# Altium PCB 敏儿好学.PcbDoc (part 2 of 6)
Units mm, origin at the board's own origin, x right, y up, seen from the top; angles counter-clockwise.
Board outline 169.8 x 134.24 mm, 2 copper layers (Top Layer, Bottom Layer); 131 components, 191 nets, 797 pads, 168 vias.
Unrouted connection lines stored in the file: 2.
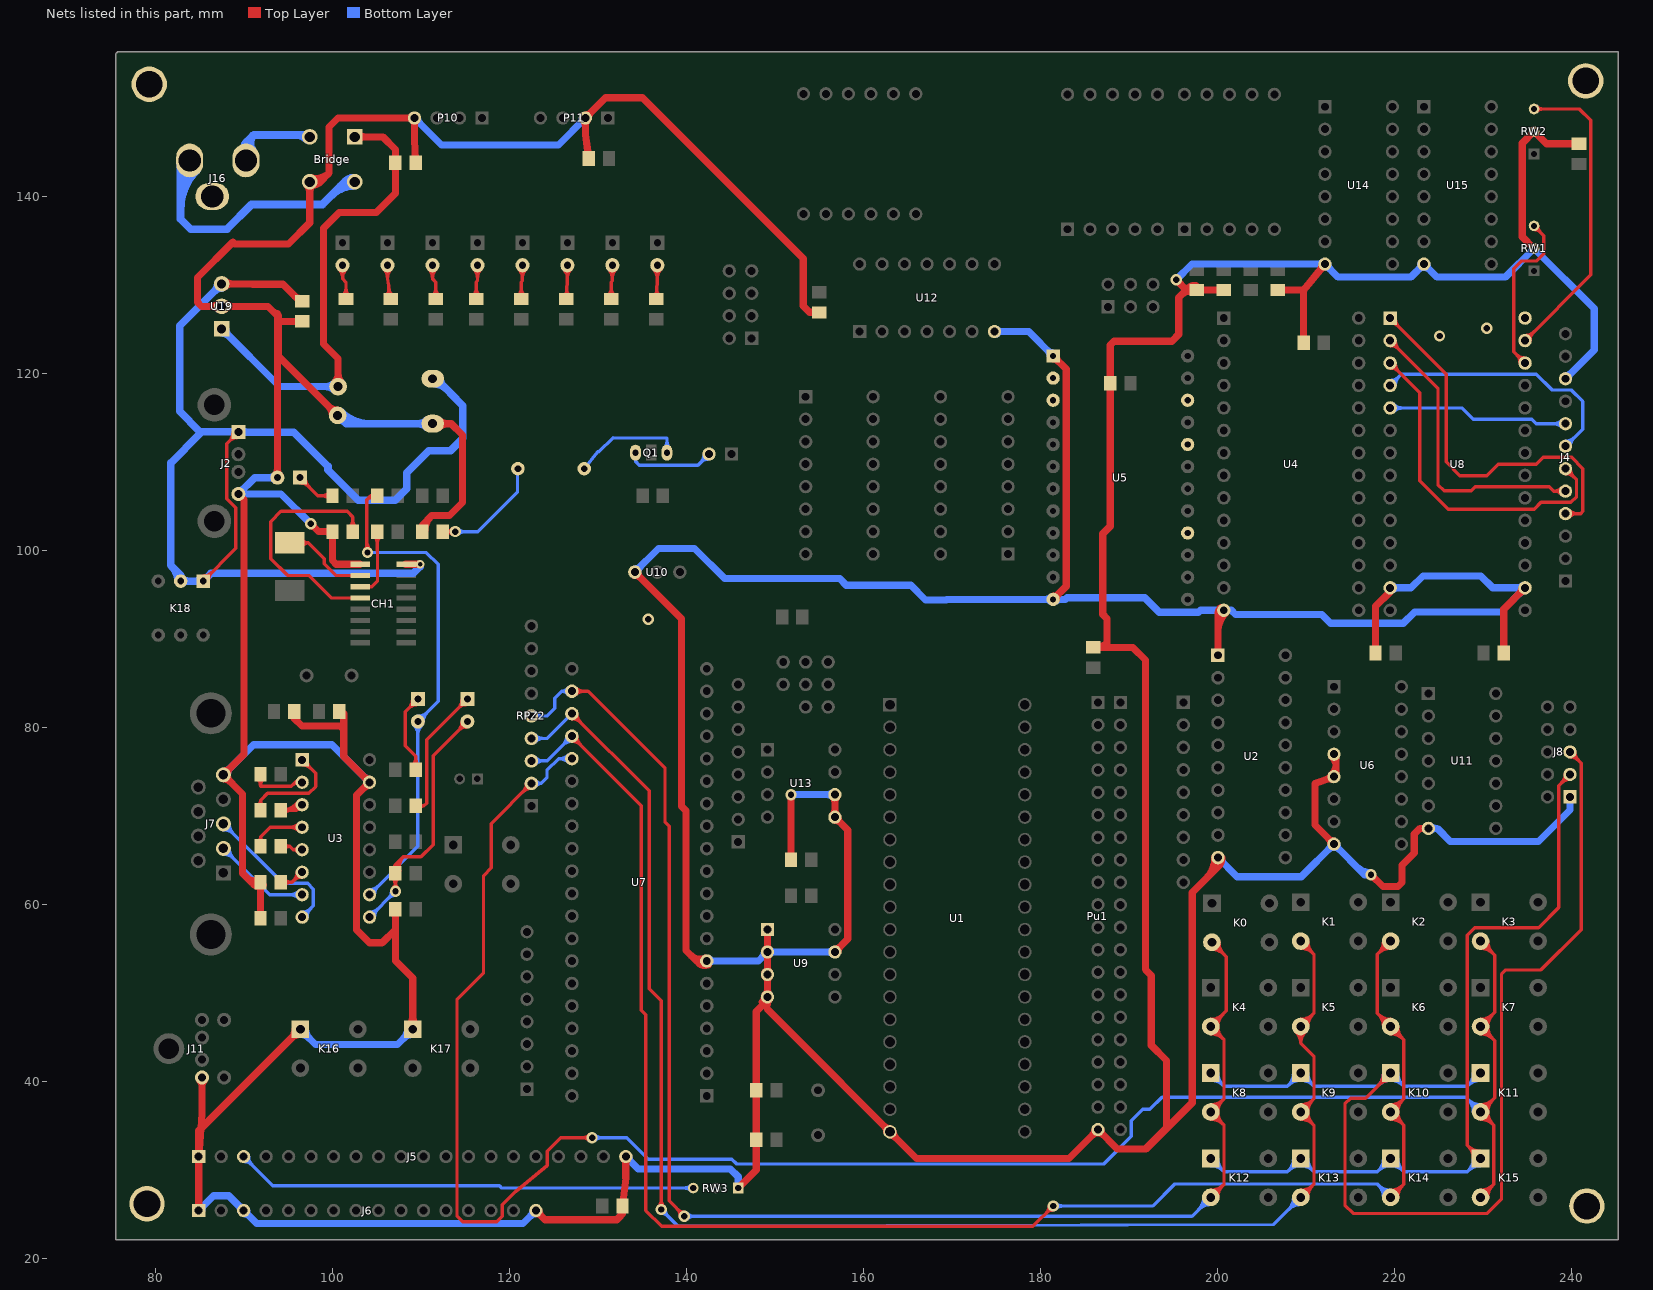
[diagram p2: the nets of this part, all layers, seen from the top]

## Via types
v1: diameter 1.27, hole 0.711, Top Layer to Bottom Layer, 165 vias
v2: diameter 1, hole 0.5, Top Layer to Bottom Layer, 3 vias

## Nets (pads, with @x,y where several pads share a name; then routed paths per layer and width w, separated by ;. In a path a pad name is that pad's centre, name@x,y a point inside that pad or via, vN(x,y) a via of type N, cw(c..) or ccw(c..) an arc to the next point about the centre after c; other vN are vias at no path point) (continued)
GND: Bridge.4 C1.2 C2.2 C3.2 C7.1 C8.1 C9.2 C10.2 C11.2 C12.2 C13.2 C14.2 C15.2 C16.2 C17.2 C18.2 C19.2 C20.2 C21.2 C22.2 C24.1 C42.1 CH1.1 D9.2 J2.4 J4.10 J5.1 J5.20 J6.1 J6.3 J6.16 J7.5 J8.1 J11.3 K16.1 K17.1 P10.4 P11.2 pad.0@78.994,26.162 pad.1@79.248,152.654 pad.2 pad.3 Pu1.20 R12.1 R16.1 R17.2 R22.1 R23.2 RW1.2 RW2.2 RW3.1 U1.20 U2.1 U2.10 U3.15 U4.14 U5.1 U5.12 U6.4 U6.5 U6.8 U7.7 U8.13 U8.16 U9.1 U9.2 U9.3 U9.4 U9.7 U10.1 U11.7 U12.7 U13.5 U13.6 U14.8 U15.8 U19.2 | length 1321.9
  Top Layer w0.813: J6.1@84.593,25.643 ccw(c84.006,26.23) 84.836,26.23 ccw(c85.666,26.23) J6.1@85.079,25.643 ; J5.1@84.593,31.253 cw(c84.006,30.666) 84.836,30.666 cw(c85.666,30.666) J5.1@85.079,31.253 ; J5.1@84.593,31.739 ccw(c84.006,32.326) 84.836,32.326 ccw(c85.666,32.326) J5.1@85.079,31.739 ; J5.1@84.612,31.757 ccw(c84.072,32.387) 84.9,32.323 ccw(c85.727,32.26) J5.1@85.097,31.72 ; J6.1@84.836,25.4 84.836,34.406 K16.1@96.318,45.888 ; J5.1@84.836,31.496 85.078,34.648 85.208,36.338 J11.3@85.208,40.438 ; J11.3@84.93,40.16 cw(c84.258,39.488) 85.208,39.488 cw(c86.158,39.488) J11.3@85.486,40.16 ; U19.2@87.086,127.218 ccw(c86.262,126.394) 86.262,127.559 ccw(c86.262,128.724) U19.2@87.086,127.9 ; J7.5@87.628,74.189 cw(c87.628,73.131) 88.377,73.879 cw(c89.125,74.628) 88.067,74.628 cw(c89.125,74.628) 88.377,75.377 cw(c87.628,76.125) J7.5@87.628,75.067 ; U19.2@87.768,127.218 cw(c88.592,126.394) 88.592,127.559 cw(c88.592,128.724) U19.2@87.768,127.9 ; J2.4@89.317,106.355 89.941,105.731 89.941,76.941 J7.5@87.628,74.628 89.789,72.467 89.789,63.5 90.805,62.484 C8.1@91.821,62.484 C7.1@91.821,58.42 ; 90.361,62.928 ccw(c91.051,63.619) C8.1@91.644,62.843 ; 91.017,62.272 ccw(c91.62,62.874) C8.1@92.137,62.197 ; C7.1@91.614,58.754 ccw(c91.116,59.252) 91.821,59.252 ccw(c92.526,59.252) C7.1@92.028,58.754 ; C8.1@91.614,62.15 cw(c91.116,61.652) 91.821,61.652 cw(c92.526,61.652) C8.1@92.028,62.15 ; C8.1@91.614,62.277 ccw(c91.116,61.779) 91.116,62.484 ccw(c91.116,63.189) C8.1@91.614,62.691 ; D9.2@93.448,108.482 ccw(c92.776,109.154) 93.726,109.154 ccw(c94.676,109.154) D9.2@94.004,108.482 ; D9.2@93.726,108.204 93.726,126.746 ; 93.726,126.492 92.659,127.559 85.166,127.559 84.709,128.016 84.709,130.81 88.695,134.796 88.872,134.62 94.996,134.62 97.384,137.008 Bridge.4@97.384,141.63 98.577,141.63 99.568,142.621 ; 93.853,125.603 94.107,125.857 C12.2@96.52,125.857 ; 93.853,126.492 93.853,121.92 C21.2@100.533,115.24 ; C19.2@95.631,81.788 95.631,81.026 96.52,80.137 100.838,80.137 101.219,79.756 ; K16.1@95.724,45.888 cw(c94.291,45.888) 95.305,44.875 cw(c96.318,43.861) K16.1@96.318,45.294 ; C12.2@96.186,125.65 ccw(c95.688,125.152) 95.688,125.857 ccw(c95.688,126.562) C12.2@96.186,126.064 ; Bridge.4@97.042,141.289 cw(c96.218,140.465) 97.384,140.465 cw(c98.549,140.465) 97.725,141.289 cw(c98.549,140.465) 98.549,141.63 cw(c98.549,142.796) Bridge.4@97.725,141.972 ; Bridge.4@97.292,141.313 ccw(c97.66,142.584) 98.595,141.648 ; v1(97.485,102.997) 98.374,102.108 C42.1@99.949,102.108 99.949,98.831 100.355,98.425 CH1.1@103.064,98.425 ; Bridge.4@97.518,142.094 ccw(c98.097,144.092) 99.568,142.621 ; C42.1@99.742,101.774 cw(c99.244,101.276) 99.949,101.276 cw(c100.654,101.276) C42.1@100.156,101.774 ; C42.1@99.742,101.901 ccw(c99.244,101.403) 99.244,102.108 ccw(c99.244,102.813) C42.1@99.742,102.315 ; C21.2@99.94,115.24 ccw(c98.507,115.24) 99.52,116.253 ccw(c100.533,117.266) C21.2@100.533,115.833 ; C20.2@101.219,81.534 101.219,76.708 U3.15@104.14,73.787 102.667,72.314 102.667,57.125 104.14,55.651 105.562,55.651 107.061,57.15 ; U3.15@104.14,73.443 ccw(c104.14,72.614) 103.553,73.2 ccw(c102.967,73.787) 103.796,73.787 ccw(c102.967,73.787) 103.553,74.374 ccw(c104.14,74.96) U3.15@104.14,74.131 ; R12.1@106.854,59.102 cw(c106.356,58.604) 107.061,58.604 cw(c107.766,58.604) R12.1@107.268,59.102 ; R12.1@107.061,59.436 107.061,53.621 109.018,51.664 K17.1@109.018,45.888 ; K17.1@108.598,46.308 ccw(c107.585,47.321) 109.018,47.321 ccw(c110.451,47.321) K17.1@109.438,46.308 ; P10.4@108.977,149.087 cw(c108.39,149.674) 108.39,148.844 cw(c108.39,148.014) 108.977,148.601 cw(c108.39,148.014) 109.22,148.014 cw(c110.05,148.014) P10.4@109.463,148.601 ; 109.307,144.61 ccw(c110.032,144.644) C11.2@109.543,144.107 ; C11.2@109.347,143.764 109.22,146.431 P10.4@109.22,148.844 100.584,148.844 99.568,147.828 99.568,142.621 ; R23.2@110.109,102.108 110.109,102.87 111.172,103.933 113.162,103.933 114.639,105.41 114.639,113.03 113.369,114.3 C22.2@111.277,114.3 ; R23.2@110.401,102.235 cw(c112.639,102.235) 111.057,103.818 ; C22.2@111.962,113.869 cw(c113.003,112.828) 113.003,114.3 cw(c113.003,115.772) C22.2@111.962,114.731 ; J6.16@122.936,25.056 cw(c122.936,24.227) 123.523,24.813 cw(c124.109,25.4) J6.16@123.28,25.4 ; J6.16@122.936,25.4 123.977,24.359 132.08,24.359 132.715,24.994 C24.1@132.715,25.908 133.096,29.083 J5.20@133.096,31.496 ; P11.2@128.281,148.601 cw(c127.694,148.014) 128.524,148.014 cw(c129.354,148.014) P11.2@128.767,148.601 ; P11.2@128.524,149.188 ccw(c128.524,150.017) 129.111,149.431 ccw(c129.697,148.844) P11.2@128.868,148.844 ; 128.781,145.137 ccw(c129.54,145.246) C9.2@129.08,144.633 ; C9.2@128.905,144.272 128.524,146.939 P11.2@128.524,148.844 130.81,151.13 134.987,151.13 153.137,132.981 153.137,127.598 153.862,126.873 C1.2@154.94,126.873 ; 132.474,24.752 ccw(c132.044,25.182) C24.1@132.497,25.586 ; C24.1@132.508,25.574 cw(c132.01,25.076) 132.715,25.076 cw(c133.42,25.076) C24.1@132.922,25.574 ; C24.1@132.535,26.265 ccw(c132.067,26.86) 132.818,26.77 ; J5.20@132.853,31.253 cw(c132.266,30.666) 133.096,30.666 cw(c133.926,30.666) J5.20@133.339,31.253 ; U10.1@134.112,97.18 cw(c134.112,96.322) 134.719,96.929 cw(c135.326,97.536) U10.1@134.468,97.536 ; U10.1@134.112,97.536 139.395,92.253 139.395,71.069 139.903,70.561 139.903,54.777 141.086,53.594 U7.7@142.24,53.594 ; 140.48,54.2 ccw(c141.487,55.206) U7.7@142.09,53.916 ; 141.301,53.379 ccw(c142.009,54.088) U7.7@142.433,53.18 ; U7.7@141.989,53.343 ccw(c141.382,52.736) 141.382,53.594 ccw(c141.382,54.452) U7.7@141.989,53.845 ; RW3.1@145.796,27.94 147.828,29.972 147.828,47.879 149.098,49.149 U9.1@149.098,57.15 ; C18.2@147.621,33.067 cw(c147.123,32.569) 147.828,32.569 cw(c148.533,32.569) C18.2@148.035,33.067 ; C18.2@147.621,33.735 ccw(c147.123,34.233) 147.828,34.233 ccw(c148.533,34.233) C18.2@148.035,33.735 ; C17.2@147.621,38.655 cw(c147.123,38.157) 147.828,38.157 cw(c148.533,38.157) C17.2@148.035,38.655 ; C17.2@147.621,39.323 ccw(c147.123,39.821) 147.828,39.821 ccw(c148.533,39.821) C17.2@148.035,39.323 ; U9.4@148.754,49.53 cw(c147.925,49.53) 148.511,48.943 cw(c149.098,48.357) U9.4@149.098,49.186 ; U9.4@148.855,49.287 cw(c148.268,48.7) 149.098,48.7 cw(c149.928,48.7) U9.4@149.341,49.287 ; U9.4@148.855,49.773 ccw(c148.268,50.36) 149.098,50.36 ccw(c149.928,50.36) U9.4@149.341,49.773 ; U9.3@148.855,51.827 cw(c148.268,51.24) 149.098,51.24 cw(c149.928,51.24) U9.3@149.341,51.827 ; U9.3@148.855,52.313 ccw(c148.268,52.9) 149.098,52.9 ccw(c149.928,52.9) U9.3@149.341,52.313 ; U9.2@148.855,54.367 cw(c148.268,53.78) 149.098,53.78 cw(c149.928,53.78) U9.2@149.341,54.367 ; U9.2@148.855,54.853 ccw(c148.268,55.44) 149.098,55.44 ccw(c149.928,55.44) U9.2@149.341,54.853 ; U9.1@148.855,56.907 cw(c148.268,56.32) 149.098,56.32 cw(c149.928,56.32) U9.1@149.341,56.907 ; 149.098,48.133 165.953,31.278 183.17,31.278 Pu1.20@186.436,34.544 188.646,32.334 191.872,32.334 197.104,37.567 197.104,61.341 200,64.237 U2.10@200,65.278 ; C16.2@151.558,65.358 ccw(c151.06,65.856) 151.765,65.856 ccw(c152.47,65.856) C16.2@151.972,65.358 ; C16.2@151.765,65.024 v1(151.765,72.39) ; 153.612,127.123 ccw(c154.132,127.642) C1.2@154.619,127.092 ; C1.2@154.606,126.666 ccw(c154.108,126.168) 154.108,126.873 ccw(c154.108,127.578) C1.2@154.606,127.08 ; U13.5@156.475,70.093 ccw(c155.888,70.68) 156.718,70.68 ccw(c157.548,70.68) U13.5@156.961,70.093 ; U13.6@156.475,72.147 cw(c155.888,71.56) 156.718,71.56 cw(c157.548,71.56) U13.6@156.961,72.147 ; U9.7@156.718,54.61 158.179,56.071 158.179,68.389 U13.5@156.718,69.85 U13.6@156.718,72.39 ; U9.7@156.718,54.954 ccw(c156.718,55.783) 157.305,55.197 ccw(c157.891,54.61) U9.7@157.062,54.61 ; U13.5@156.718,69.506 cw(c156.718,68.677) 157.305,69.263 cw(c157.891,69.85) U13.5@157.062,69.85 ; U1.20@162.585,34.29 ccw(c161.727,34.29) 162.334,34.897 ccw(c162.941,35.504) U1.20@162.941,34.646 ; U1.20@162.941,33.934 cw(c162.941,33.076) 163.548,33.683 cw(c164.155,34.29) U1.20@163.297,34.29 ; U5.12@181.376,94.454 182.855,95.933 182.855,120.475 U5.1@181.376,121.954 ; U5.12@181.376,94.798 ccw(c181.376,95.627) 181.963,95.041 ccw(c182.549,94.454) U5.12@181.72,94.454 ; U5.1@181.376,121.61 cw(c181.376,120.781) 181.963,121.367 cw(c182.549,121.954) U5.1@181.72,121.954 ; C2.2@185.928,89.027 190.373,89.027 191.808,87.592 191.808,52.618 192.457,51.969 192.457,44.068 194.183,42.342 194.183,34.747 191.77,32.334 ; Pu1.20@186.092,34.544 cw(c185.263,34.544) 185.849,33.957 cw(c186.436,33.371) 186.436,34.2 cw(c186.436,33.371) 187.023,33.957 cw(c187.609,34.544) Pu1.20@186.78,34.544 ; C2.2@186.186,89.288 ccw(c186.687,90.287) 187.477,89.497 ; C2.2@186.262,88.82 cw(c186.76,88.322) 186.76,89.027 cw(c186.76,89.732) C2.2@186.262,89.234 ; 187.007,89.027 187.477,89.497 ; C15.2@187.626,118.538 cw(c187.128,118.04) 187.833,118.04 cw(c188.538,118.04) C15.2@188.04,118.538 ; C15.2@187.626,119.206 ccw(c187.128,119.704) 187.833,119.704 ccw(c188.538,119.704) C15.2@188.04,119.206 ; v1(195.275,130.556) 196.418,129.413 ; 195.885,128.88 cw(c196.817,127.947) R17.2@197.364,129.147 ; 196.553,129.548 cw(c197.485,128.615) R17.2@197.485,129.934 ; R17.2@197.278,129.206 ccw(c196.78,128.708) 196.78,129.413 ccw(c196.78,130.118) R17.2@197.278,129.62 ; R17.2@197.946,129.206 cw(c198.444,128.708) 198.444,129.413 cw(c198.444,130.118) R17.2@197.946,129.62 ; 198.656,62.893 ccw(c196.271,65.278) U2.10@199.644,65.278 ; U2.10@199.748,65.027 cw(c199.141,64.42) 200,64.42 cw(c200.858,64.42) U2.10@200.251,65.027 ; U2.1@199.748,88.389 ccw(c199.141,88.996) 200,88.996 ccw(c200.858,88.996) U2.1@200.251,88.389 ; U2.1@200,88.138 200,92.558 U4.14@200.66,93.218 ; 200,90.765 cw(c203.113,90.765) U4.14@200.911,92.967 ; 200,92.727 cw(c201.151,92.727) U4.14@200.337,93.541 ; 200.044,64.281 ccw(c199.046,65.278) U2.10@200.457,65.278 ; R16.1@200.326,129.206 ccw(c199.828,128.708) 199.828,129.413 ccw(c199.828,130.118) R16.1@200.326,129.62 ; R16.1@200.66,129.413 196.418,129.413 ; R22.1@206.756,129.413 209.677,129.413 ; R22.1@207.09,129.206 cw(c207.588,128.708) 207.588,129.413 cw(c207.588,130.118) R22.1@207.09,129.62 ; C3.2@209.47,123.778 ccw(c208.972,124.276) 209.677,124.276 ccw(c210.382,124.276) C3.2@209.884,123.778 ; C3.2@209.677,123.444 209.677,129.413 ; U14.8@211.748,132.301 cw(c210.922,132.223) 211.562,131.694 cw(c212.201,131.166) U14.8@212.123,131.992 ; U14.8@212.09,132.334 209.677,129.413 ; U6.8@212.762,66.802 ccw(c211.933,66.802) 212.519,67.389 ccw(c213.106,67.975) U6.8@213.106,67.146 ; U6.5@212.796,74.57 cw(c212.047,74.926) 212.324,74.145 cw(c212.602,73.363) U6.5@212.958,74.112 ; U6.5@212.863,74.665 ccw(c211.706,75.822) 213.342,75.822 ; U6.4@212.863,76.719 cw(c211.706,75.562) 213.342,75.562 ; U6.8@213.106,66.802 210.959,68.949 210.959,73.66 U6.5@213.106,74.422 213.342,74.658 213.342,76.726 U6.4@213.106,76.962 ; v1(217.297,63.348) 218.643,62.001 220.345,62.001 220.802,62.459 220.802,64.417 222.187,65.802 222.187,67.945 222.822,68.58 U11.7@223.774,68.58 ; C10.2@217.598,88.726 ccw(c217.1,89.224) 217.805,89.224 ccw(c218.51,89.224) C10.2@218.012,88.726 ; C10.2@217.805,88.392 217.805,93.675 219.456,95.326 U8.13@219.456,95.758 ; C13.2@232.076,88.726 ccw(c231.578,89.224) 232.283,89.224 ccw(c232.988,89.224) C13.2@232.49,88.726 ; C13.2@232.283,88.392 232.283,93.345 U8.16@234.696,95.758 ; U8.16@234.34,95.758 cw(c233.482,95.758) 234.089,95.151 cw(c234.696,94.544) U8.16@234.696,95.402 ; RW1.2@235.712,134.112 234.391,135.433 234.391,145.999 RW2.2@235.712,147.32 237.109,145.923 C14.2@240.792,145.923 ; C14.2@240.458,145.716 ccw(c239.96,145.218) 239.96,145.923 ccw(c239.96,146.628) C14.2@240.458,146.13 ; 187.477,89.497 187.477,92.266 186.982,92.761 186.982,101.867 187.833,102.718 187.833,123.19 188.265,123.622 194.793,123.622 195.58,124.409 195.58,128.575 196.418,129.413
  Bottom Layer w0.813: J6.1@84.836,25.4 86.512,27.076 88.24,27.076 91.389,23.927 121.463,23.927 J6.16@122.936,25.4 ; J6.1@84.836,25.744 ccw(c84.836,26.573) 85.423,25.987 ccw(c86.009,25.4) J6.1@85.18,25.4 ; J7.5@87.628,74.628 91.029,78.029 99.898,78.029 U3.15@104.14,73.787 ; J7.5@87.628,75.067 ccw(c87.628,76.125) 88.377,75.377 ccw(c89.125,74.628) J7.5@88.067,74.628 ; J2.4@89.317,106.749 ccw(c89.317,107.699) 89.989,107.027 ccw(c90.661,106.355) J2.4@89.711,106.355 ; J6.3@89.572,25.4 ccw(c88.743,25.4) 89.329,25.987 ccw(c89.916,26.573) J6.3@89.916,25.744 ; J2.4@89.595,106.077 cw(c90.267,105.405) 90.267,106.355 cw(c90.267,107.305) J2.4@89.595,106.633 ; J6.3@89.916,25.056 cw(c89.916,24.227) 90.503,24.813 cw(c91.089,25.4) J6.3@90.26,25.4 ; D9.2@93.448,107.926 ccw(c92.776,107.254) 92.776,108.204 ccw(c92.776,109.154) D9.2@93.448,108.482 ; D9.2@93.726,108.204 91.166,108.204 J2.4@89.317,106.355 94.127,106.355 v1(97.485,102.997) ; K16.1@96.318,45.294 cw(c96.318,43.861) 97.331,44.875 cw(c98.345,45.888) K16.1@96.912,45.888 ; K16.1@96.318,45.888 98.035,44.171 107.301,44.171 K17.1@109.018,45.888 ; C21.2@100.378,115.085 ccw(c102.273,116.979) 102.273,114.3 ; C21.2@100.533,115.24 101.473,114.3 C22.2@111.277,114.3 ; C21.2@100.953,115.66 ccw(c104.235,118.942) 104.235,114.3 ; U3.15@103.796,73.787 ccw(c102.967,73.787) 103.553,74.374 ccw(c104.14,74.96) U3.15@104.14,74.131 ; K17.1@108.424,45.888 cw(c106.991,45.888) 108.005,44.875 cw(c109.018,43.861) K17.1@109.018,45.294 ; P10.4@109.22,148.5 cw(c109.22,147.671) 109.807,148.257 cw(c110.393,148.844) P10.4@109.564,148.844 ; P10.4@109.22,148.844 112.268,145.796 125.476,145.796 P11.2@128.524,148.844 ; C22.2@110.592,113.869 ccw(c109.552,112.828) 109.552,114.3 ccw(c109.552,115.772) C22.2@110.592,114.731 ; J6.16@122.592,25.4 cw(c121.763,25.4) 122.349,24.813 cw(c122.936,24.227) J6.16@122.936,25.056 ; P11.2@128.18,148.844 cw(c127.351,148.844) 127.937,148.257 cw(c128.524,147.671) P11.2@128.524,148.5 ; J5.20@133.096,31.152 cw(c133.096,30.323) 133.683,30.909 cw(c134.269,31.496) J5.20@133.44,31.496 ; J5.20@133.096,31.496 134.487,30.105 144.901,30.105 145.796,29.21 RW3.1@145.796,27.94 ; U10.1@134.112,97.536 136.779,100.203 140.868,100.203 144.272,96.799 157.258,96.799 158.005,96.052 165.302,96.052 166.967,94.387 169.292,94.387 169.359,94.454 182.778,94.454 182.965,94.64 191.719,94.64 193.37,92.989 197.815,92.989 198.044,93.218 201.498,93.218 201.981,92.735 211.734,92.735 212.725,91.745 220.929,91.745 222.225,93.04 231.978,93.04 U8.16@234.696,95.758 231.041,95.758 229.694,97.104 223.152,97.104 221.805,95.758 U8.13@219.456,95.758 ; U10.1@134.112,97.892 ccw(c134.112,98.75) 134.719,98.143 ccw(c135.326,97.536) U10.1@134.468,97.536 ; U7.7@142.24,53.594 148.082,53.594 U9.2@149.098,54.61 U9.7@156.718,54.61 ; U7.7@142.491,53.343 cw(c143.098,52.736) 143.098,53.594 cw(c143.098,54.452) U7.7@142.491,53.845 ; U9.2@148.754,54.61 cw(c147.925,54.61) 148.511,54.023 cw(c149.098,53.437) U9.2@149.098,54.266 ; U9.2@149.341,54.367 cw(c149.928,53.78) 149.928,54.61 cw(c149.928,55.44) U9.2@149.341,54.853 ; v1(151.765,72.39) U13.6@156.718,72.39 ; U9.7@156.475,54.367 ccw(c155.888,53.78) 155.888,54.61 ccw(c155.888,55.44) U9.7@156.475,54.853 ; U13.6@156.475,72.147 ccw(c155.888,71.56) 155.888,72.39 ccw(c155.888,73.22) U13.6@156.475,72.633 ; U12.7@174.752,124.714 178.616,124.714 U5.1@181.376,121.954 ; U12.7@174.995,124.471 cw(c175.582,123.884) 175.582,124.714 cw(c175.582,125.544) U12.7@174.995,124.957 ; U5.1@181.032,121.954 ccw(c180.203,121.954) 180.789,122.541 ccw(c181.376,123.127) U5.1@181.376,122.298 ; U5.12@181.133,94.211 ccw(c180.546,93.624) 180.546,94.454 ccw(c180.546,95.284) U5.12@181.133,94.697 ; U5.12@181.619,94.211 cw(c182.206,93.624) 182.206,94.454 cw(c182.206,95.284) U5.12@181.619,94.697 ; v1(195.275,130.556) 197.053,132.334 U14.8@212.09,132.334 213.563,130.861 221.793,130.861 U15.8@223.266,132.334 224.739,130.861 232.461,130.861 RW1.2@235.712,134.112 242.519,127.305 242.519,122.631 J4.10@239.268,119.38 ; U2.10@200,64.922 cw(c200,64.064) 200.607,64.671 cw(c201.214,65.278) U2.10@200.355,65.278 ; U2.10@200,65.278 202.159,63.119 209.423,63.119 U6.8@213.106,66.802 216.56,63.348 v1(217.297,63.348) ; U4.14@200.409,92.967 ccw(c199.802,92.36) 199.802,93.218 ccw(c199.802,94.076) U4.14@200.409,93.469 ; U14.8@211.847,132.091 ccw(c211.26,131.504) 211.26,132.334 ccw(c211.26,133.164) U14.8@211.847,132.577 ; U14.8@212.09,131.99 cw(c212.09,131.161) 212.677,131.747 cw(c213.263,132.334) U14.8@212.434,132.334 ; U6.8@212.762,66.802 cw(c211.933,66.802) 212.519,66.215 cw(c213.106,65.629) 213.106,66.458 cw(c213.106,65.629) 213.693,66.215 cw(c214.279,66.802) U6.8@213.45,66.802 ; 215.649,64.259 ccw(c217.297,65.906) v1@217.297,63.576 ; U8.13@219.707,95.507 cw(c220.314,94.9) 220.314,95.758 cw(c220.314,96.616) U8.13@219.707,96.009 ; U15.8@222.922,132.334 cw(c222.093,132.334) 222.679,131.747 cw(c223.266,131.161) 223.266,131.99 cw(c223.266,131.161) 223.853,131.747 cw(c224.439,132.334) U15.8@223.61,132.334 ; U11.7@223.774,68.58 224.765,68.58 226.238,67.107 236.219,67.107 239.776,70.663 J8.1@239.776,72.136 ; U11.7@224.017,68.337 cw(c224.604,67.75) 224.604,68.58 cw(c224.604,69.41) U11.7@224.017,68.823 ; U8.16@234.34,95.758 cw(c233.482,95.758) 234.089,95.151 cw(c234.696,94.544) U8.16@234.696,95.402 ; U8.16@234.445,95.507 ccw(c233.838,94.9) 233.838,95.758 ccw(c233.838,96.616) U8.16@234.445,96.009 ; J4.10@239.268,119.724 ccw(c239.268,120.553) 239.855,119.967 ccw(c240.441,119.38) J4.10@239.612,119.38 ; J8.1@239.533,71.893 cw(c238.946,71.306) 239.776,71.306 cw(c240.606,71.306) J8.1@240.019,71.893
  other v1: 135.636,92.202 225.044,124.206 230.378,125.095
IN0: RW1.3 U8.26 | length 22.6
  Top Layer w0.381: U8.26@234.124,121.158 ccw(c232.745,121.158) 233.72,122.134 ccw(c234.696,123.109) U8.26@234.696,121.73 ; U8.26@234.696,121.158 233.426,122.428 233.426,131.801 234.315,132.69 236.017,132.69 236.807,133.48 236.807,135.557 RW1.3@235.712,136.652 ; RW1.3@235.712,136.243 cw(c235.712,135.254) 236.411,135.953 cw(c237.11,136.652) RW1.3@236.121,136.652
IN1: RW2.3 U8.27 | length 38.6
  Top Layer w0.381: U8.27@234.696,123.698 242.113,131.115 242.113,148.59 240.843,149.86 RW2.3@235.712,149.86 ; U8.27@234.696,124.269 ccw(c234.696,125.649) 235.672,124.674 ccw(c236.647,123.698) U8.27@235.267,123.698 ; RW2.3@236.002,149.57 cw(c236.701,148.871) 236.701,149.86 cw(c236.701,150.849) RW2.3@236.002,150.15
IN2: U8.28
IN3: J4.4 U8.1 | length 47.5
  Top Layer w0.381: U8.1@219.456,125.666 cw(c219.456,124.287) 220.432,125.262 cw(c221.407,126.238) U8.1@220.028,126.238 ; U8.1@219.456,126.238 225.781,119.913 225.781,109.982 227.33,108.433 230.378,108.433 231.673,109.728 235.966,109.728 236.728,110.49 239.954,110.49 241.224,109.22 241.224,104.394 240.97,104.14 J4.4@239.268,104.14 ; J4.4@239.664,103.744 cw(c240.619,102.789) 240.619,104.14 cw(c240.619,105.491) J4.4@239.664,104.536
IN4: J4.5 U8.2 | length 37.9
  Top Layer w0.381: U8.2@219.456,123.126 cw(c219.456,121.747) 220.432,122.722 cw(c221.407,123.698) U8.2@220.028,123.698 ; U8.2@219.456,123.698 224.857,118.297 224.857,107.404 225.543,106.718 228.613,106.718 229.083,107.188 237.414,107.188 237.922,106.68 ; J4.5@238.871,106.285 ccw(c237.922,105.34) 237.922,106.68 ; J4.5@238.871,107.075 cw(c237.922,108.02) 237.922,106.68 ; J4.5@239.268,106.68 237.922,106.68
IN5: J4.6 U8.3 | length 42.3
  Top Layer w0.381: U8.3@219.456,120.587 cw(c219.456,119.207) 220.432,120.182 cw(c221.407,121.158) U8.3@220.028,121.158 ; U8.3@219.456,121.158 222.79,117.824 222.79,107.864 226.006,104.648 235.737,104.648 236.499,105.41 239.878,105.41 240.513,106.045 240.513,107.975 J4.6@239.268,109.22 ; J4.6@239.268,108.661 cw(c239.268,107.31) 240.223,108.265 cw(c241.178,109.22) J4.6@239.827,109.22
IN6: J4.7 U8.4 | length 33.7
  Bottom Layer w0.381: U8.4@219.456,118.618 220.726,119.888 235.966,119.888 237.744,118.11 239.903,118.11 241.199,116.814 241.199,113.691 J4.7@239.268,111.76 ; U8.4@219.456,119.189 ccw(c219.456,120.569) 220.432,119.594 ccw(c221.407,118.618) U8.4@220.028,118.618 ; J4.7@239.268,112.319 ccw(c239.268,113.67) 240.223,112.715 ccw(c241.178,111.76) J4.7@239.827,111.76
IN7: J4.8 U8.5 | length 24.8
  Bottom Layer w0.381: U8.5@219.456,116.078 227.559,116.078 228.829,114.808 235.458,114.808 235.966,114.3 J4.8@239.268,114.3 ; U8.5@219.86,115.674 cw(c220.836,114.698) 220.836,116.078 cw(c220.836,117.458) U8.5@219.86,116.482 ; J4.8@238.872,113.904 ccw(c237.917,112.949) 237.917,114.3 ccw(c237.917,115.651) J4.8@238.872,114.696
INPUT: C12.1 C22.1 CH1.16 J2.1 K18.1 K18.2 U19.3 | length 160
  Top Layer w0.381: K18.1@85.344,96.52 89.027,100.203 89.027,104.813 88.011,105.829 88.011,112.049 J2.1@89.317,113.355 ; K18.1@85.344,97.091 ccw(c85.344,98.471) 86.32,97.496 ccw(c87.295,96.52) K18.1@85.915,96.52 ; J2.1@88.708,113.355 cw(c87.236,113.355) 88.277,112.315 cw(c89.317,111.274) J2.1@89.317,112.746
  Top Layer w0.813: U19.3@87.427,130.099 90.881,130.099 90.932,130.048 94.361,130.048 96.266,128.143 C12.1@96.52,128.143 ; U19.3@87.768,129.758 cw(c88.592,128.934) 88.592,130.099 cw(c88.592,131.264) U19.3@87.768,130.44 ; 95.678,128.731 ccw(c96.393,129.447) C12.1@96.393,128.435
  Top Layer w0.864: CH1.16@108.264,98.425 v2(109.855,98.425)
  Bottom Layer w0.864: 81.791,98.168 cw(c80.144,96.52) K18.2@82.474,96.52 ; K18.2@83.037,96.287 cw(c83.601,95.723) 83.601,96.52 cw(c83.601,97.317) K18.2@83.037,96.753 ; K18.1@85.111,96.287 ccw(c84.547,95.723) 84.547,96.52 ccw(c84.547,97.317) K18.1@85.111,96.753 ; U19.3@86.97,130.099 cw(c85.866,130.099) 86.646,129.318 cw(c87.427,128.538) U19.3@87.427,129.642 ; U19.3@87.427,130.099 82.677,125.349 82.677,115.697 84.963,113.411 ; 88.293,113.411 cw(c88.293,112.331) J2.1@89.057,113.095 ; J2.1@89.577,113.095 cw(c90.206,112.466) 90.206,113.355 cw(c90.206,114.244) J2.1@89.577,113.615 ; v2(109.855,98.425) 109.855,98.171 109.093,97.409 86.233,97.409 K18.1@85.344,96.52 K18.2@82.804,96.52 82.804,97.155 81.661,98.298 81.661,109.855 84.963,113.157 84.963,113.411 ; C22.1@111.531,118.796 cw(c111.531,117.079) 112.745,118.293 ; C22.1@111.531,119.507 113.182,117.856 113.284,117.729 114.681,116.332 114.681,112.649 113.284,111.252 110.82,111.252 108.331,108.763 108.331,106.934 107.061,105.664 102.87,105.664 99.441,109.093 99.441,109.474 95.56,113.355 89.535,113.355 89.479,113.411 84.963,113.411 ; C22.1@112.116,119.38 ccw(c113.219,119.38) 112.439,118.6
KEY5: K0.2 K4.2 K8.2 K12.2 RPZ2.5 U7.22 | length 207.3
  Top Layer w0.381: U7.22@127,84.074 128.827,84.074 137.527,75.374 137.527,69.262 137.986,68.804 137.986,26.479 v1(139.7,24.765) ; U7.22@127.404,83.67 cw(c128.38,82.694) 128.38,84.074 cw(c128.38,85.454) U7.22@127.404,84.478 ; v1@139.255,24.765 ccw(c138.182,24.765) 138.941,25.524 ccw(c139.7,26.283) v1@139.7,25.21 ; K12.2@199.188,26.883 200.685,28.38 200.685,35.038 K8.2@199.188,36.535 200.685,38.032 200.685,44.69 K4.2@199.188,46.187 200.953,47.952 200.953,54.074 K0.2@199.315,55.712 ; K12.2@199.188,27.312 ccw(c199.188,28.346) 199.92,27.614 ccw(c200.651,26.883) K12.2@199.617,26.883 ; K12.2@199.188,27.693 ccw(c199.188,29.647) 200.57,28.265 ccw(c201.952,26.883) K12.2@199.998,26.883 ; K8.2@199.188,35.726 cw(c199.188,33.771) 200.57,35.153 cw(c201.952,36.535) 199.998,36.535 cw(c201.952,36.535) 200.57,37.917 cw(c199.188,39.299) K8.2@199.188,37.345 ; K8.2@199.188,36.107 cw(c199.188,35.072) 199.92,35.804 cw(c200.651,36.535) 199.617,36.535 cw(c200.651,36.535) 199.92,37.266 cw(c199.188,37.998) K8.2@199.188,36.964 ; K4.2@199.188,45.378 cw(c199.188,43.423) 200.57,44.805 cw(c201.952,46.187) 199.998,46.187 cw(c201.952,46.187) 200.57,47.569 cw(c199.188,48.951) K4.2@199.188,46.997 ; K4.2@199.188,45.759 cw(c199.188,44.724) 199.92,45.456 cw(c200.651,46.187) 199.617,46.187 cw(c200.651,46.187) 199.92,46.918 cw(c199.188,47.65) K4.2@199.188,46.616 ; K0.2@199.315,54.903 cw(c199.315,52.948) 200.697,54.33 cw(c202.079,55.712) K0.2@200.125,55.712 ; K0.2@199.315,55.284 cw(c199.315,54.249) 200.047,54.981 cw(c200.778,55.712) K0.2@199.744,55.712
  Bottom Layer w0.381: RPZ2.5@122.428,81.28 124.206,81.28 125.057,82.131 125.057,83.284 125.847,84.074 ; RPZ2.5@122.832,80.876 cw(c123.808,79.9) 123.808,81.28 cw(c123.808,82.66) RPZ2.5@122.832,81.684 ; U7.22@126.545,83.728 ccw(c125.847,83.196) 125.847,84.074 ; U7.22@126.545,84.42 cw(c125.847,84.952) 125.847,84.074 ; U7.22@127,84.074 125.847,84.074 ; v1(139.7,24.765) 197.07,24.765 K12.2@199.188,26.883 ; v1@140.014,24.451 cw(c140.773,23.692) 140.773,24.765 cw(c140.773,25.838) v1@140.014,25.079 ; K12.2@198.379,26.883 cw(c196.424,26.883) 197.806,25.501 cw(c199.188,24.119) K12.2@199.188,26.074 ; K12.2@198.76,26.883 cw(c197.725,26.883) 198.457,26.152 cw(c199.188,25.42) K12.2@199.188,26.455
KEY6: K1.2 K5.2 K9.2 K13.2 RPZ2.4 U7.23 | length 211.6
  Top Layer w0.381: U7.23@127,80.962 cw(c127,79.583) 127.976,80.558 cw(c128.951,81.534) U7.23@127.572,81.534 ; U7.23@127,81.534 135.725,72.809 135.725,50.453 137.096,49.081 v1(137.096,25.514) ; v1@136.782,25.829 ccw(c136.023,26.587) 137.096,26.587 ccw(c138.17,26.587) v1@137.411,25.829 ; K5.2@208.795,45.596 cw(c207.604,44.322) 209.348,44.322 ; K13.2@209.348,26.883 210.845,28.38 210.845,35.038 K9.2@209.348,36.535 210.845,38.032 210.845,42.824 209.348,44.322 ; K13.2@209.348,27.312 ccw(c209.348,28.346) 210.08,27.614 ccw(c210.811,26.883) K13.2@209.777,26.883 ; K13.2@209.348,27.693 ccw(c209.348,29.647) 210.73,28.265 ccw(c212.112,26.883) K13.2@210.158,26.883 ; K9.2@209.348,35.726 cw(c209.348,33.771) 210.73,35.153 cw(c212.112,36.535) 210.158,36.535 cw(c212.112,36.535) 210.73,37.917 cw(c209.348,39.299) K9.2@209.348,37.345 ; K9.2@209.348,36.107 cw(c209.348,35.072) 210.08,35.804 cw(c210.811,36.535) 209.777,36.535 cw(c210.811,36.535) 210.08,37.266 cw(c209.348,37.998) K9.2@209.348,36.964 ; K5.2@209.348,46.616 ccw(c209.348,47.65) 210.08,46.918 ccw(c210.811,46.187) K5.2@209.777,46.187 ; K5.2@209.348,46.997 ccw(c209.348,48.951) 210.73,47.569 ccw(c212.112,46.187) K5.2@210.158,46.187 ; K1.2@209.348,55.03 cw(c209.348,53.075) 210.73,54.457 cw(c212.112,55.839) K1.2@210.158,55.839 ; K1.2@209.348,55.411 cw(c209.348,54.376) 210.08,55.108 cw(c210.811,55.839) K1.2@209.777,55.839 ; K1.2@209.348,55.839 210.845,54.342 210.845,47.684 K5.2@209.348,46.187 209.348,44.322 ; K5.2@209.901,45.596 ccw(c211.092,44.322) 209.348,44.322
  Bottom Layer w0.381: RPZ2.4@122.428,78.74 124.206,78.74 U7.23@127,81.534 ; RPZ2.4@122.832,78.336 cw(c123.808,77.36) 123.808,78.74 cw(c123.808,80.12) RPZ2.4@122.832,79.144 ; v1@137.096,25.07 cw(c137.096,23.997) 137.855,24.755 cw(c138.614,25.514) v1@137.541,25.514 ; v1(137.096,25.514) 138.989,23.622 140.64,23.622 206.29,23.825 K13.2@209.348,26.883 ; K13.2@208.539,26.883 cw(c206.584,26.883) 207.966,25.501 cw(c209.348,24.119) K13.2@209.348,26.074 ; K13.2@208.92,26.883 cw(c207.885,26.883) 208.617,26.152 cw(c209.348,25.42) K13.2@209.348,26.455
KEY7: K2.2 K6.2 K10.2 K14.2 RPZ2.3 U7.24 | length 225.7
  Top Layer w0.381: U7.24@127,78.422 cw(c127,77.043) 127.976,78.018 cw(c128.951,78.994) U7.24@127.572,78.994 ; U7.24@127,78.994 134.835,71.159 134.835,48.043 135.357,47.521 135.357,25.4 137.135,23.622 179.095,23.622 v1(181.381,25.908) ; v1@180.937,25.908 cw(c179.864,25.908) 180.623,25.149 cw(c181.381,24.39) v1@181.381,25.463 ; K6.2@218.699,46.187 ccw(c216.744,46.187) 218.126,47.569 ccw(c219.508,48.951) K6.2@219.508,46.997 ; K2.2@218.699,55.839 cw(c216.744,55.839) 218.126,54.457 cw(c219.508,53.075) K2.2@219.508,55.03 ; K6.2@219.08,46.187 ccw(c218.045,46.187) 218.777,46.918 ccw(c219.508,47.65) K6.2@219.508,46.616 ; K2.2@219.08,55.839 cw(c218.045,55.839) 218.777,55.108 cw(c219.508,54.376) K2.2@219.508,55.411 ; K14.2@219.508,26.883 221.005,28.38 221.005,35.038 K10.2@219.508,36.535 221.005,38.032 221.005,44.69 K6.2@219.508,46.187 218.013,47.682 218.013,54.344 K2.2@219.508,55.839 ; K14.2@219.508,27.312 ccw(c219.508,28.346) 220.24,27.614 ccw(c220.971,26.883) K14.2@219.937,26.883 ; K14.2@219.508,27.693 ccw(c219.508,29.647) 220.89,28.265 ccw(c222.272,26.883) K14.2@220.318,26.883 ; K10.2@219.508,35.726 cw(c219.508,33.771) 220.89,35.153 cw(c222.272,36.535) 220.318,36.535 cw(c222.272,36.535) 220.89,37.917 cw(c219.508,39.299) K10.2@219.508,37.345 ; K10.2@219.508,36.107 cw(c219.508,35.072) 220.24,35.804 cw(c220.971,36.535) 219.937,36.535 cw(c220.971,36.535) 220.24,37.266 cw(c219.508,37.998) K10.2@219.508,36.964 ; K6.2@219.508,45.378 cw(c219.508,43.423) 220.89,44.805 cw(c222.272,46.187) K6.2@220.318,46.187 ; K6.2@219.508,45.759 cw(c219.508,44.724) 220.24,45.456 cw(c220.971,46.187) K6.2@219.937,46.187
  Bottom Layer w0.381: RPZ2.3@122.428,76.2 124.206,76.2 U7.24@127,78.994 ; RPZ2.3@122.832,75.796 cw(c123.808,74.82) 123.808,76.2 cw(c123.808,77.58) RPZ2.3@122.832,76.604 ; U7.24@126.428,78.994 cw(c125.049,78.994) 126.024,78.018 cw(c127,77.043) U7.24@127,78.422 ; v1(181.381,25.908) 192.608,25.908 195.097,28.397 217.994,28.397 K14.2@219.508,26.883 ; v1@181.696,25.594 cw(c182.455,24.835) 182.455,25.908 cw(c182.455,26.981) v1@181.696,26.222 ; K14.2@218.699,26.883 ccw(c216.744,26.883) 218.126,28.265 ccw(c219.508,29.647) K14.2@219.508,27.693 ; K14.2@219.08,26.883 ccw(c218.045,26.883) 218.777,27.614 ccw(c219.508,28.346) K14.2@219.508,27.312
KEY8: K3.2 K7.2 K11.2 K15.2 RPZ2.2 U7.25 | length 261
  Top Layer w0.381: RPZ2.2@121.856,73.66 cw(c120.477,73.66) 121.452,72.684 cw(c122.428,71.709) RPZ2.2@122.428,73.088 ; RPZ2.2@122.428,73.66 117.881,69.113 117.881,64.11 117.018,63.246 117.018,52.281 114.023,49.286 114.023,24.765 114.658,24.13 118.491,24.13 119.126,24.765 119.126,26.035 120.65,27.559 124.206,30.48 124.206,32.106 125.73,33.63 v1(129.286,33.63) ; v1@128.972,33.315 ccw(c128.213,32.556) 128.213,33.63 ccw(c128.213,34.703) v1@128.972,33.944 ; K15.2@229.668,26.883 231.165,28.38 231.165,35.038 K11.2@229.668,36.535 231.282,38.149 231.282,44.573 K7.2@229.668,46.187 231.282,47.801 231.282,54.225 K3.2@229.668,55.839 ; K15.2@229.668,27.312 ccw(c229.668,28.346) 230.4,27.614 ccw(c231.131,26.883) K15.2@230.097,26.883 ; K15.2@229.668,27.693 ccw(c229.668,29.647) 231.05,28.265 ccw(c232.432,26.883) K15.2@230.478,26.883 ; K11.2@229.668,35.726 cw(c229.668,33.771) 231.05,35.153 cw(c232.432,36.535) 230.478,36.535 cw(c232.432,36.535) 231.05,37.917 cw(c229.668,39.299) K11.2@229.668,37.345 ; K11.2@229.668,36.107 cw(c229.668,35.072) 230.4,35.804 cw(c231.131,36.535) 230.097,36.535 cw(c231.131,36.535) 230.4,37.266 cw(c229.668,37.998) K11.2@229.668,36.964 ; K7.2@229.668,45.378 cw(c229.668,43.423) 231.05,44.805 cw(c232.432,46.187) 230.478,46.187 cw(c232.432,46.187) 231.05,47.569 cw(c229.668,48.951) K7.2@229.668,46.997 ; K7.2@229.668,45.759 cw(c229.668,44.724) 230.4,45.456 cw(c231.131,46.187) 230.097,46.187 cw(c231.131,46.187) 230.4,46.918 cw(c229.668,47.65) K7.2@229.668,46.616 ; K3.2@229.668,55.03 cw(c229.668,53.075) 231.05,54.457 cw(c232.432,55.839) K3.2@230.478,55.839 ; K3.2@229.668,55.411 cw(c229.668,54.376) 230.4,55.108 cw(c231.131,55.839) K3.2@230.097,55.839
  Bottom Layer w0.381: RPZ2.2@122.428,73.66 123.55,73.66 ; RPZ2.2@122.89,73.324 cw(c123.55,72.844) 123.55,73.66 ; RPZ2.2@122.89,73.996 ccw(c123.55,74.476) 123.55,73.66 ; U7.25@126.596,76.05 ccw(c125.62,75.074) 125.62,76.454 ccw(c125.62,77.834) U7.25@126.596,76.858 ; U7.25@127,76.454 125.491,76.454 124.185,75.148 124.185,74.295 123.55,73.66 ; v1(129.286,33.63) 133.188,33.63 135.612,31.205 145.076,31.205 145.623,30.658 187.096,30.658 190.221,33.783 190.221,35.56 191.491,36.83 192.303,36.83 193.675,38.202 228.001,38.202 K11.2@229.668,36.535 ; v1@129.6,33.315 cw(c130.359,32.556) 130.359,33.63 cw(c130.359,34.703) v1@129.6,33.944 ; K11.2@228.859,36.535 ccw(c226.904,36.535) 228.286,37.917 ccw(c229.668,39.299) K11.2@229.668,37.345 ; K11.2@229.24,36.535 ccw(c228.205,36.535) 228.937,37.266 ccw(c229.668,37.998) K11.2@229.668,36.964
NC1: U5.2
NC2: U5.3
NC3: U5.16
NC4: U5.20
NC5: U5.22
NetBridge_1: Bridge.2 C11.1 C21.1 U19.1 | length 64.7
  Top Layer w0.813: C21.1@100.164,118.911 ccw(c99.151,119.924) 100.584,119.924 ccw(c102.017,119.924) C21.1@101.004,118.911 ; C21.1@100.584,118.491 100.584,121.666 98.933,123.317 98.933,136.398 100.711,138.176 104.902,138.176 107.061,140.335 107.061,145.288 105.639,146.71 Bridge.2@102.464,146.71 ; Bridge.2@102.805,146.369 cw(c103.629,145.545) 103.629,146.71 cw(c103.629,147.876) Bridge.2@102.805,147.052 ; C11.1@106.854,143.43 cw(c106.356,142.932) 107.061,142.932 cw(c107.766,142.932) C11.1@107.268,143.43 ; C11.1@106.854,144.098 ccw(c106.356,144.596) 107.061,144.596 ccw(c107.766,144.596) C11.1@107.268,144.098
  Bottom Layer w0.813: U19.1@87.427,124.536 cw(c87.427,123.371) 88.251,124.195 cw(c89.075,125.019) U19.1@87.909,125.019 ; U19.1@87.427,125.019 93.955,118.491 C21.1@100.584,118.491 ; C21.1@100.164,118.071 ccw(c99.151,117.058) 99.151,118.491 ccw(c99.151,119.924) C21.1@100.164,118.911
NetBridge_2: Bridge.1 J16.1 | length 15.2
  Bottom Layer w0.9: J16.1@90.043,143.891 90.043,145.923 91.059,146.939 ; J16.1@90.302,144.537 cw(c91.263,145.357) 90.37,146.25 ; J16.1@90.987,145.121 cw(c92.007,145.991) 91.059,146.939 ; 95.772,146.939 cw(c95.772,145.099) Bridge.1@97.073,146.4 ; Bridge.1@97.384,146.71 97.155,146.939 91.059,146.939
NetBridge_4: Bridge.3 J16.2 J16.3 | length 46.3
  Top Layer w0.381: J16.2@83.82,142.519 J16.2@83.82,144.043
  Bottom Layer w0.9: 82.804,138.617 cw(c88.866,138.617) J16.2@84.579,142.903 ; 82.804,140.789 cw(c86.693,140.789) J16.2@83.943,143.539 ; J16.2@83.566,144.145 83.185,144.145 82.804,143.764 82.804,137.414 83.947,136.271 88.011,136.271 90.805,139.065 98.806,139.065 101.371,141.63 Bridge.3@102.464,141.63 ; 99.85,140.109 cw(c102.464,137.495) Bridge.3@102.464,141.191 ; 100.825,141.084 cw(c101.639,140.27) Bridge.3@102.236,141.255 ; 101.386,141.645 cw(c102.464,140.568) Bridge.3@102.464,142.091 ; Bridge.3@102.153,141.32 ccw(c101.404,140.571) 101.404,141.63 ccw(c101.404,142.69) Bridge.3@102.153,141.941
NetBZ1_1: pad.0@128.397,109.22 Q1.3 | length 14.1
  Bottom Layer w0.381: pad.0@128.397,109.22 129.921,111.125 130.048,111.125 131.653,112.73 137.744,112.649 Q1.3@137.744,111.023 ; Q1.3@137.455,111.613 ccw(c136.756,112.312) 137.744,112.312 ccw(c138.733,112.312) Q1.3@138.034,111.613
NetBZ1_2: pad.1@120.904,109.22 R23.1 | length 18.4
  Top Layer w0.381: R23.1@112.395,102.108 v1(113.817,102.108) ; R23.1@112.754,101.749 cw(c113.621,100.882) 113.621,102.108 cw(c113.621,103.334) R23.1@112.754,102.467 ; v1@113.503,101.794 ccw(c112.744,101.035) 112.744,102.108 ccw(c112.744,103.181) v1@113.503,102.422
  Bottom Layer w0.381: v1(113.817,102.108) 116.372,102.108 120.86,106.597 120.86,108.922 pad.1@121.158,109.22 ; v1@114.132,101.794 cw(c114.891,101.035) 114.891,102.108 cw(c114.891,103.181) v1@114.132,102.422
NetC4_1: C4.1 U3.3 | length 9.8
  Top Layer w0.381: C4.1@94.466,70.253 cw(c95.333,69.386) 95.333,70.612 cw(c95.333,71.838) C4.1@94.466,70.971 ; 94.877,70.612 ccw(c94.877,72.5) U3.3@96.378,71.355 ; 95.646,70.612 ccw(c95.646,71.913) U3.3@96.681,71.124 ; U3.3@96.075,71.586 cw(c94.107,73.087) C4.1@94.107,70.612 95.885,70.612 U3.3@96.52,71.247
NetC4_2: C4.2 U3.1 | length 15.2
  Top Layer w0.381: C4.2@91.516,71.145 ccw(c91.059,71.755) 91.821,71.755 ; C4.2@91.821,70.612 91.821,71.755 ; C4.2@92.126,71.145 cw(c92.583,71.755) 91.821,71.755 ; U3.1@96.52,75.768 cw(c96.52,74.417) 97.475,75.372 cw(c98.43,76.327) U3.1@97.079,76.327 ; U3.1@96.52,76.327 98.044,74.803 98.044,73.304 97.282,72.542 92.608,72.542 91.821,71.755
NetC5_1: C5.1 U3.5 | length 5.3
  Top Layer w0.381: C5.1@94.107,66.548 95.123,66.548 ; C5.1@94.513,66.243 cw(c95.123,65.786) 95.123,66.548 ; C5.1@94.513,66.853 ccw(c95.123,67.31) 95.123,66.548 ; U3.5@96.047,65.868 ccw(c95.504,65.524) 95.504,66.167 ; U3.5@96.047,66.466 cw(c95.504,66.81) 95.504,66.167 ; U3.5@96.52,66.167 95.504,66.167 ; 95.123,66.548 95.504,66.167
NetC5_2: C5.2 U3.4 | length 9.6
  Top Layer w0.381: C5.2@91.538,67.097 ccw(c91.182,67.627) 91.821,67.627 ; C5.2@91.821,66.548 91.821,67.627 ; C5.2@92.104,67.097 cw(c92.46,67.627) 91.821,67.627 ; U3.4@96.124,68.311 ccw(c95.169,67.356) 95.169,68.707 ccw(c95.169,70.058) U3.4@96.124,69.103 ; U3.4@96.52,68.707 92.9,68.707 91.821,67.627
NetC6_1: C6.1 U3.2 | length 10.2
  Top Layer w0.381: C6.1@91.469,74.183 cw(c90.672,73.355) 91.821,73.355 ; C6.1@91.821,74.676 91.821,73.355 ; C6.1@92.173,74.183 ccw(c92.97,73.355) 91.821,73.355 ; 95.323,73.378 cw(c96.077,72.624) U3.2@96.456,73.62 ; 95.739,73.794 cw(c96.307,73.227) U3.2@96.592,73.976 ; U3.2@96.52,73.787 95.733,73.787 95.301,73.355 91.821,73.355
NetC8_2: C8.2 U3.6 | length 6.9
  Top Layer w0.381: C8.2@94.107,62.484 95.377,62.484 U3.6@96.52,63.627 ; C8.2@94.466,62.125 cw(c95.333,61.258) 95.333,62.484 cw(c95.333,63.71) C8.2@94.466,62.843 ; U3.6@95.961,63.627 cw(c94.61,63.627) 95.565,62.672 cw(c96.52,61.717) U3.6@96.52,63.068
NetC42_2: C42.2 CH1.4 | length 29.7
  Top Layer w0.381: C42.2@101.876,102.594 ccw(c101.009,103.461) 102.235,103.461 ccw(c103.461,103.461) C42.2@102.594,102.594 ; C42.2@102.235,102.108 102.235,103.759 101.6,104.394 94.132,104.394 92.964,103.226 92.964,99.06 94.869,97.155 97.268,97.155 99.808,94.615 CH1.4@103.064,94.615
NetCH1_2: CH1.2 D12.2 | length 11.7
  Top Layer w0.381: D12.2@95.123,100.838 97.231,100.838 ; D12.2@96.47,100.374 cw(c97.231,99.981) 97.231,100.838 ; D12.2@96.47,101.302 ccw(c97.231,101.695) 97.231,100.838 ; CH1.2@103.064,97.155 100.33,97.155 99.009,98.476 99.009,99.06 97.231,100.838
NetCH1_3: CH1.3 R15.2 | length 9.8
  Top Layer w0.381: CH1.3@103.064,95.885 104.394,95.885 105.042,96.533 105.042,99.924 105.029,99.936 R15.2@105.029,102.108 ; R15.2@104.67,101.622 cw(c103.803,100.755) 105.029,100.755 cw(c106.255,100.755) R15.2@105.388,101.622
NetD1_2: D1.2 R1.2 | length 7.4
  Top Layer w0.381: D1.2@136.221,131.776 cw(c135.181,130.736) 136.652,130.736 cw(c138.123,130.736) D1.2@137.083,131.776 ; R1.2@136.316,128.778 ccw(c135.791,129.373) 136.583,129.324 ; R1.2@136.525,128.397 136.652,130.429 D1.2@136.652,132.207 ; 136.589,129.421 ccw(c137.213,129.382) R1.2@136.904,128.838
NetD2_2: D2.2 R2.2 | length 8.1
  Top Layer w0.381: R2.2@131.086,128.756 ccw(c130.219,129.623) 131.445,129.623 ccw(c132.671,129.623) R2.2@131.804,128.756 ; D2.2@131.141,131.776 cw(c130.101,130.736) 131.572,130.736 cw(c133.043,130.736) D2.2@132.003,131.776 ; R2.2@131.445,128.397 131.445,130.302 131.572,130.429 D2.2@131.572,132.207
NetD3_2: D3.2 R3.2 | length 7.4
  Top Layer w0.381: D3.2@126.061,131.776 cw(c125.021,130.736) 126.492,130.736 cw(c127.963,130.736) D3.2@126.923,131.776 ; R3.2@126.156,128.778 ccw(c125.631,129.373) 126.423,129.324 ; R3.2@126.365,128.397 126.492,130.429 D3.2@126.492,132.207 ; 126.429,129.421 ccw(c127.053,129.382) R3.2@126.744,128.838
NetD4_2: D4.2 R4.2 | length 8.1
  Top Layer w0.381: R4.2@120.926,128.756 ccw(c120.059,129.623) 121.285,129.623 ccw(c122.511,129.623) R4.2@121.644,128.756 ; D4.2@120.981,131.776 cw(c119.941,130.736) 121.412,130.736 cw(c122.883,130.736) D4.2@121.843,131.776 ; R4.2@121.285,128.397 121.285,130.302 121.412,130.429 D4.2@121.412,132.207
NetD5_2: D5.2 R5.2 | length 8.1
  Top Layer w0.381: R5.2@115.846,128.756 ccw(c114.979,129.623) 116.205,129.623 ccw(c117.431,129.623) R5.2@116.564,128.756 ; D5.2@115.901,131.776 cw(c114.861,130.736) 116.332,130.736 cw(c117.803,130.736) D5.2@116.763,131.776 ; R5.2@116.205,128.397 116.205,130.302 116.332,130.429 D5.2@116.332,132.207
NetD6_2: D6.2 R6.2 | length 8.2
  Top Layer w0.381: D6.2@110.821,131.776 cw(c109.781,130.736) 111.252,130.736 cw(c112.723,130.736) D6.2@111.683,131.776 ; D6.2@111.252,132.207 111.252,130.683 111.633,130.302 R6.2@111.633,128.397 ; R6.2@111.274,128.756 ccw(c110.407,129.623) 111.633,129.623 ccw(c112.859,129.623) R6.2@111.992,128.756
NetD7_2: D7.2 R7.2 | length 8.1
  Top Layer w0.381: D7.2@105.741,131.776 cw(c104.701,130.736) 106.172,130.736 cw(c107.643,130.736) D7.2@106.603,131.776 ; R7.2@106.013,128.692 ccw(c104.667,129.654) 106.298,129.926 ; D7.2@106.172,132.207 106.172,130.683 R7.2@106.553,128.397 ; 106.398,129.329 ccw(c107.186,129.46) R7.2@106.721,128.81
NetD8_2: D8.2 R8.2 | length 8.2
  Top Layer w0.381: D8.2@100.661,131.776 cw(c99.621,130.736) 101.092,130.736 cw(c102.563,130.736) D8.2@101.523,131.776 ; D8.2@101.092,132.207 101.092,130.683 101.473,130.302 R8.2@101.473,128.397 ; R8.2@101.114,128.756 ccw(c100.247,129.623) 101.473,129.623 ccw(c102.699,129.623) R8.2@101.832,128.756
NetD9_1: D9.1 R20.2 | length 8.8
  Top Layer w0.381: D9.1@96.266,107.595 cw(c96.266,106.123) 97.306,107.164 cw(c98.347,108.204) D9.1@96.875,108.204 ; D9.1@96.266,108.204 98.298,106.172 R20.2@99.949,106.172 ; R20.2@99.59,105.813 ccw(c98.723,104.946) 98.723,106.172 ccw(c98.723,107.398) R20.2@99.59,106.531
NetD10_1: D10.1 R9.2 | length 13.3
  Top Layer w0.381: R9.2@108.988,75.67 ccw(c108.121,76.537) 109.347,76.537 ccw(c110.573,76.537) R9.2@109.706,75.67 ; D10.1@108.992,83.185 cw(c107.52,83.185) 108.561,82.145 cw(c109.601,81.104) D10.1@109.601,82.576 ; R9.2@109.347,75.184 109.347,76.733 108.179,77.902 108.179,81.763 D10.1@109.601,83.185
NetD10_2: D10.2 R25.1 U3.10 | length 69.6
  Top Layer w0.381: v1@103.597,100.06 ccw(c103.022,100.635) 103.835,100.635 ; 103.8,105.693 cw(c104.566,104.927) R25.1@104.98,105.928 ; 103.835,101.003 ccw(c105.168,101.003) v1@104.226,100.06 ; 103.905,105.797 cw(c104.295,105.407) R25.1@104.677,105.805 ; v1(103.911,99.746) 103.835,99.822 103.835,105.727 104.28,106.172 ; 104.18,106.072 cw(c104.565,105.688) R25.1@104.941,106.08 ; 104.204,106.096 cw(c104.802,105.497) R25.1@105.126,106.28 ; R25.1@104.557,105.984 ccw(c104.28,105.873) 104.28,106.172 ; R25.1@104.557,106.36 cw(c104.28,106.471) 104.28,106.172 ; R25.1@105.029,106.172 104.28,106.172
  Bottom Layer w0.381: v1(103.911,99.746) 110.566,99.746 111.887,98.425 111.887,82.931 D10.2@109.601,80.645 109.601,66.548 U3.10@104.14,61.087 ; U3.10@104.14,61.646 ccw(c104.14,62.997) 105.095,62.042 ccw(c106.05,61.087) U3.10@104.699,61.087 ; D10.2@109.17,80.214 cw(c108.13,79.174) 109.601,79.174 cw(c111.072,79.174) D10.2@110.032,80.214 ; D10.2@109.601,81.254 ccw(c109.601,82.726) 110.641,81.685 ccw(c111.682,80.645) D10.2@110.21,80.645
NetD11_1: D11.1 R10.2 | length 18.5
  Top Layer w0.381: R10.2@109.347,71.12 110.274,71.12 ; R10.2@109.775,70.847 cw(c110.274,70.528) 110.274,71.12 ; R10.2@109.775,71.393 ccw(c110.274,71.712) 110.274,71.12 ; D11.1@114.58,83.185 cw(c113.108,83.185) 114.149,82.145 cw(c115.189,81.104) D11.1@115.189,82.576 ; D11.1@115.189,83.185 110.592,78.588 110.592,71.438 110.274,71.12
NetD11_2: D11.2 R24.1 U3.9 | length 42.5
  Top Layer w0.381: R24.1@106.702,63.014 cw(c105.835,62.147) 107.061,62.147 cw(c108.287,62.147) R24.1@107.42,63.014 ; v1@106.747,61.782 ccw(c105.988,62.541) 107.061,62.541 ccw(c108.134,62.541) v1@107.375,61.782 ; R24.1@106.817,63.557 cw(c107.677,63.803) 107.045,64.436 ; R24.1@106.832,64.081 ccw(c106.644,64.452) 107.061,64.452 ; v1(107.061,61.468) R24.1@107.061,63.5 107.061,64.453 ; R24.1@107.183,63.662 cw(c108.39,64.007) 107.502,64.894 ; R24.1@107.29,64.081 cw(c107.478,64.452) 107.061,64.452 ; R24.1@107.549,63.767 cw(c109.102,64.21) 107.96,65.352 ; D11.2@114.58,80.645 cw(c113.108,80.645) 114.149,79.605 cw(c115.189,78.564) D11.2@115.189,80.036 ; D11.2@115.189,80.645 111.328,76.784 111.328,66.726 109.954,65.352 107.96,65.352 ; 107.061,64.453 107.96,65.352
  Bottom Layer w0.381: U3.9@104.14,58.547 v1(107.061,61.468) ; U3.9@104.14,59.106 ccw(c104.14,60.457) 105.095,59.502 ccw(c106.05,58.547) U3.9@104.699,58.547 ; v1@106.617,61.468 cw(c105.543,61.468) 106.302,60.709 cw(c107.061,59.95) v1@107.061,61.023
NetJ3_2: J3.2 Q1.2 | length 12.1
  Bottom Layer w0.381: Q1.2@134.188,111.023 134.188,110.058 134.62,109.626 141.249,109.626 J3.2@142.494,110.871 ; J3.2@141.935,110.871 cw(c140.584,110.871) 141.539,109.916 cw(c142.494,108.961) J3.2@142.494,110.312
NetJ5_3: J5.3 RW3.3 | length 55.9
  Bottom Layer w0.381: J5.3@89.916,30.937 cw(c89.916,29.586) 90.871,30.541 cw(c91.826,31.496) J5.3@90.475,31.496 ; J5.3@89.916,31.496 93.219,28.193 118.822,28.193 119.075,27.94 RW3.3@140.716,27.94 ; RW3.3@140.426,27.65 ccw(c139.727,26.951) 139.727,27.94 ccw(c139.727,28.929) RW3.3@140.426,28.23
NetJ7_2: J7.2 U3.7 | length 15.7
  Bottom Layer w0.381: J7.2@87.628,65.663 cw(c87.628,64.083) 88.745,65.201 cw(c89.863,66.318) J7.2@88.283,66.318 ; J7.2@87.628,66.318 92.859,61.087 U3.7@96.52,61.087 ; U3.7@96.124,60.691 ccw(c95.169,59.736) 95.169,61.087 ccw(c95.169,62.438) U3.7@96.124,61.483
NetJ7_3: J7.3 U3.8 | length 21.5
  Bottom Layer w0.381: J7.3@87.628,68.434 cw(c87.628,66.853) 88.745,67.971 cw(c89.863,69.088) J7.3@88.283,69.088 ; J7.3@87.628,69.088 94.359,62.357 97.155,62.357 97.79,61.722 97.79,59.817 U3.8@96.52,58.547 ; U3.8@96.52,59.106 ccw(c96.52,60.457) 97.475,59.502 ccw(c98.43,58.547) U3.8@97.079,58.547
NetJ8_3: J8.3 K12.1 K13.1 K14.1 K15.1 | length 122.3
  Top Layer w0.381: K15.1@228.859,31.283 ccw(c226.904,31.283) 228.286,32.665 ccw(c229.668,34.047) K15.1@229.668,32.092 ; K15.1@229.24,31.283 ccw(c228.205,31.283) 228.937,32.014 ccw(c229.668,32.746) K15.1@229.668,31.711 ; K15.1@229.668,31.283 228.168,32.783 228.168,56.515 229.006,57.353 236.22,57.353 238.506,59.639 238.506,73.406 J8.3@239.776,74.676 ; J8.3@239.217,74.676 cw(c237.866,74.676) 238.821,73.721 cw(c239.776,72.766) J8.3@239.776,74.117
  Bottom Layer w0.381: K12.1@199.188,30.473 cw(c199.188,28.519) 200.57,29.901 cw(c201.952,31.283) K12.1@199.998,31.283 ; K12.1@199.188,30.854 cw(c199.188,29.82) 199.92,30.552 cw(c200.651,31.283) K12.1@199.617,31.283 ; K12.1@199.188,31.283 200.702,29.769 207.834,29.769 K13.1@209.348,31.283 210.862,29.769 217.994,29.769 K14.1@219.508,31.283 221.022,29.769 228.154,29.769 K15.1@229.668,31.283 ; K13.1@208.539,31.283 cw(c206.584,31.283) 207.966,29.901 cw(c209.348,28.519) 209.348,30.473 cw(c209.348,28.519) 210.73,29.901 cw(c212.112,31.283) K13.1@210.158,31.283 ; K13.1@208.92,31.283 cw(c207.885,31.283) 208.617,30.552 cw(c209.348,29.82) 209.348,30.854 cw(c209.348,29.82) 210.08,30.552 cw(c210.811,31.283) K13.1@209.777,31.283 ; K14.1@218.699,31.283 cw(c216.744,31.283) 218.126,29.901 cw(c219.508,28.519) 219.508,30.473 cw(c219.508,28.519) 220.89,29.901 cw(c222.272,31.283) K14.1@220.318,31.283 ; K14.1@219.08,31.283 cw(c218.045,31.283) 218.777,30.552 cw(c219.508,29.82) 219.508,30.854 cw(c219.508,29.82) 220.24,30.552 cw(c220.971,31.283) K14.1@219.937,31.283 ; K15.1@228.859,31.283 cw(c226.904,31.283) 228.286,29.901 cw(c229.668,28.519) K15.1@229.668,30.473 ; K15.1@229.24,31.283 cw(c228.205,31.283) 228.937,30.552 cw(c229.668,29.82) K15.1@229.668,30.854
NetJ8_5: J8.5 K8.1 K9.1 K10.1 K11.1 | length 163.2
  Top Layer w0.381: K10.1@218.699,40.935 cw(c216.744,40.935) 218.126,39.553 cw(c219.508,38.171) K10.1@219.508,40.125 ; K10.1@219.08,40.935 cw(c218.045,40.935) 218.777,40.204 cw(c219.508,39.472) K10.1@219.508,40.506 ; K10.1@219.508,40.935 216.673,38.1 214.986,38.1 214.351,37.465 214.351,25.984 215.265,25.07 230.429,25.07 232.029,26.67 232.029,52.07 232.537,52.578 236.499,52.578 241.046,57.125 241.046,75.946 J8.5@239.776,77.216 ; J8.5@239.776,76.657 cw(c239.776,75.306) 240.731,76.261 cw(c241.686,77.216) J8.5@240.335,77.216
  Bottom Layer w0.381: K8.1@199.188,40.125 cw(c199.188,38.171) 200.57,39.553 cw(c201.952,40.935) K8.1@199.998,40.935 ; K8.1@199.188,40.506 cw(c199.188,39.472) 199.92,40.204 cw(c200.651,40.935) K8.1@199.617,40.935 ; K8.1@199.188,40.935 200.702,39.421 207.834,39.421 K9.1@209.348,40.935 210.862,39.421 217.994,39.421 K10.1@219.508,40.935 221.022,39.421 228.154,39.421 K11.1@229.668,40.935 ; K9.1@208.539,40.935 cw(c206.584,40.935) 207.966,39.553 cw(c209.348,38.171) 209.348,40.125 cw(c209.348,38.171) 210.73,39.553 cw(c212.112,40.935) K9.1@210.158,40.935 ; K9.1@208.92,40.935 cw(c207.885,40.935) 208.617,40.204 cw(c209.348,39.472) 209.348,40.506 cw(c209.348,39.472) 210.08,40.204 cw(c210.811,40.935) K9.1@209.777,40.935 ; K10.1@218.699,40.935 cw(c216.744,40.935) 218.126,39.553 cw(c219.508,38.171) 219.508,40.125 cw(c219.508,38.171) 220.89,39.553 cw(c222.272,40.935) K10.1@220.318,40.935 ; K10.1@219.08,40.935 cw(c218.045,40.935) 218.777,40.204 cw(c219.508,39.472) 219.508,40.506 cw(c219.508,39.472) 220.24,40.204 cw(c220.971,40.935) K10.1@219.937,40.935 ; K11.1@228.859,40.935 cw(c226.904,40.935) 228.286,39.553 cw(c229.668,38.171) K11.1@229.668,40.125 ; K11.1@229.24,40.935 cw(c228.205,40.935) 228.937,40.204 cw(c229.668,39.472) K11.1@229.668,40.506